# Altium PCB PCB_OSUKeyboardBottom.pcbdoc
Units mil, origin at the board's own origin, x right, y up, seen from the top; angles counter-clockwise.
Board outline 5218.84 x 4281.32 mil, 2 copper layers (Top Layer, Bottom Layer); 17 components, 10 nets, 48 pads, 0 vias.
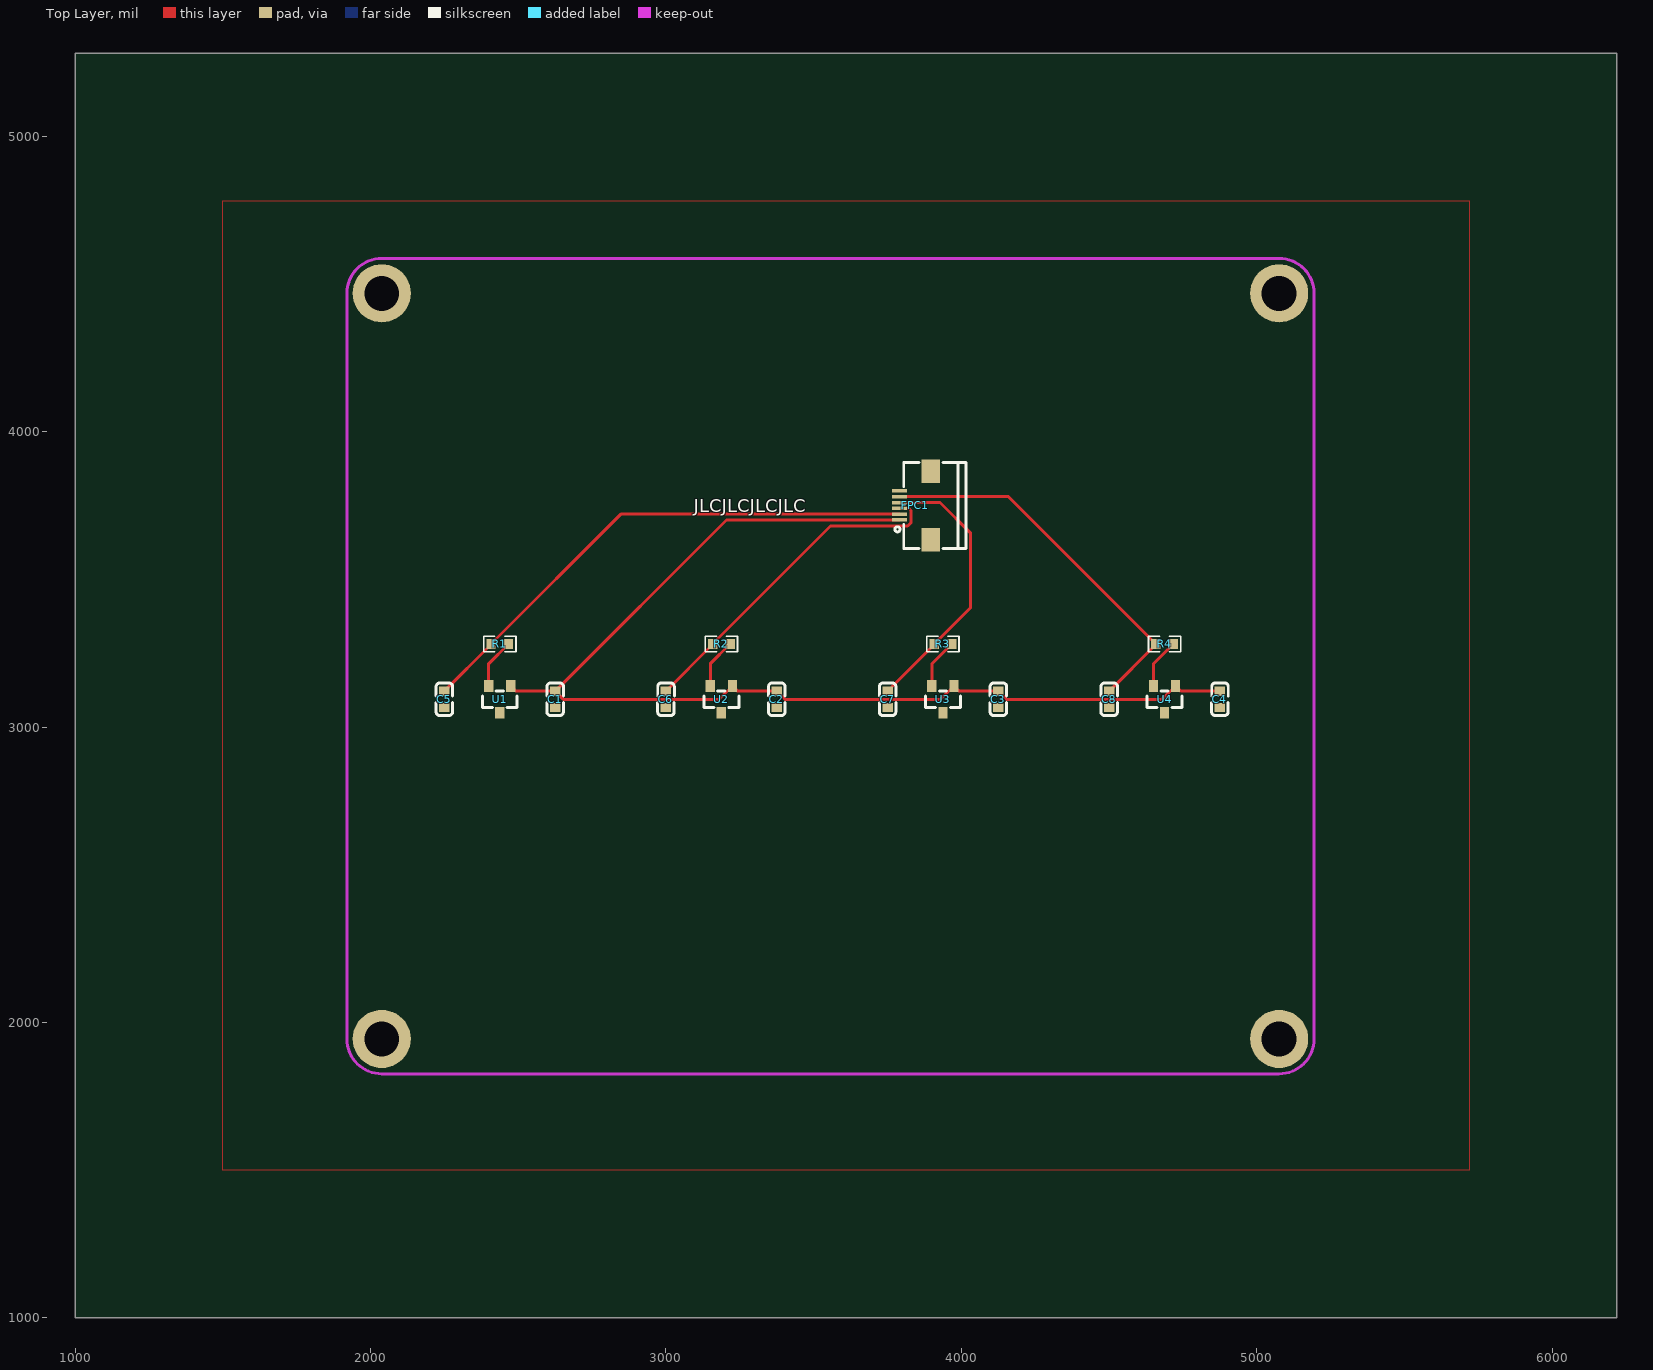
[diagram p0: Top Layer view]
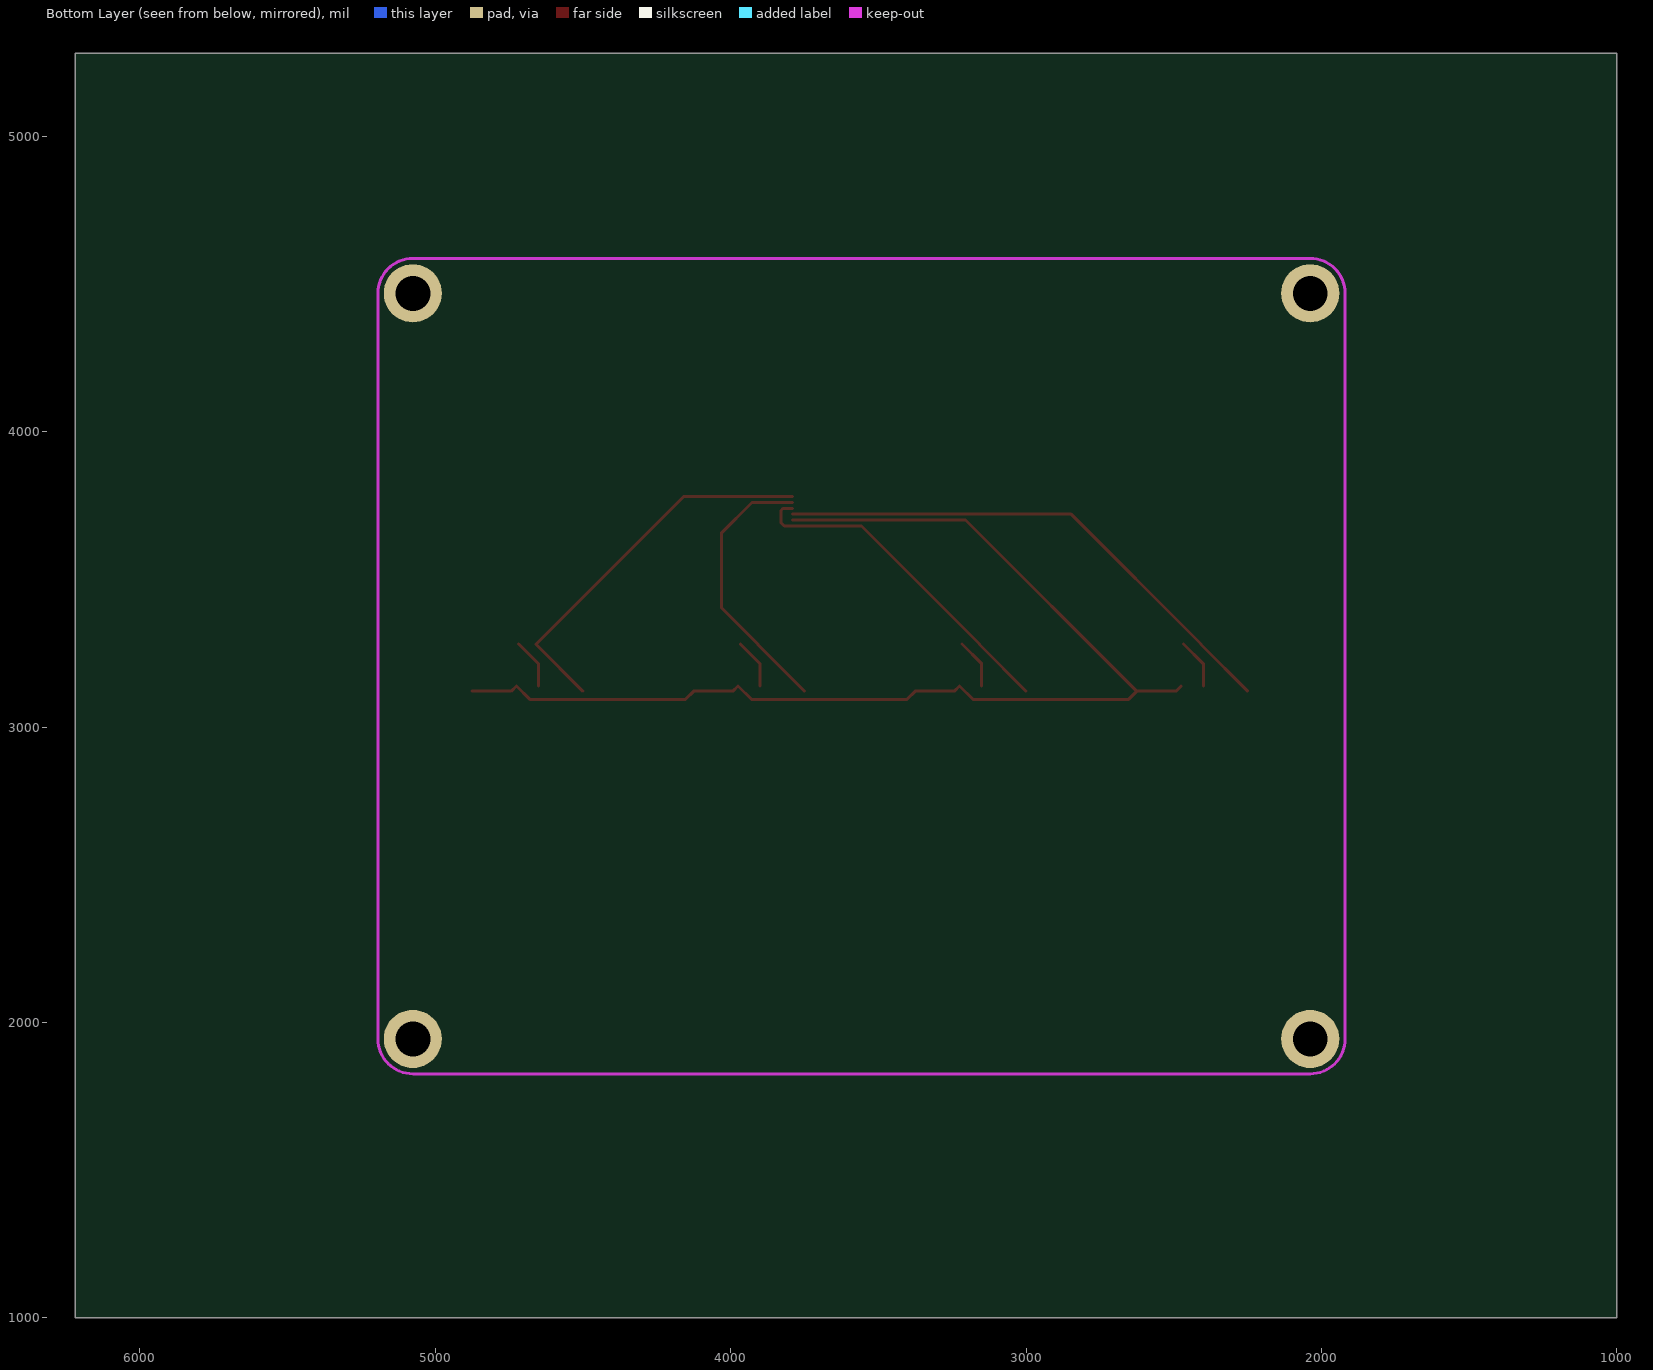
[diagram p1: Bottom Layer view, seen from below]

## Layer stack, top to bottom
Top Layer: signal copper (thickness not stored)
Dielectric: dielectric 12.6, FR-4, Dk 4.8
Bottom Layer: signal copper (thickness not stored)

## Board outline
6218.84,1000 1000,1000 1000,5281.32 6218.84,5281.32

## Components (designator, comment, footprint, x,y, rotation, side; value= is the part's Value field where it differs from the comment)
C1 "0.1u" C0603 2625.02,3093.78 r270 top
C2 "0.1u" C0603 3375.04,3093.78 r270 top
C3 "0.1u" C0603 4125.06,3093.78 r270 top
C4 "0.1u" C0603 4875.07,3093.78 r270 top
C5 "0.1u" C0603 2250.02,3093.78 r270 top
C6 "0.1u" C0603 3000.03,3093.78 r270 top
C7 "0.1u" C0603 3750.05,3093.78 r270 top
C8 "0.1u" C0603 4500.06,3093.78 r270 top
FPC1 "AFC01-S06FCA-00" FPC-SMD_P0.50-6P_AFC01-S06FCA-00 3843.8,3750.05 r90 top
R1 "1k" R0603 2437.52,3281.29 r180 top
R2 "1k" R0603 3187.54,3281.29 r180 top
R3 "1k" R0603 3937.55,3281.29 r180 top
R4 "1k" R0603 4687.57,3281.29 r180 top
U1 "DRV5056A2QDBZR" SOT-23_L2.9-W1.3-P1.90-LS2.4-BR 2437.52,3093.78 r90 top
U2 "DRV5056A2QDBZR" SOT-23_L2.9-W1.3-P1.90-LS2.4-BR 3187.54,3093.78 r90 top
U3 "DRV5056A2QDBZR" SOT-23_L2.9-W1.3-P1.90-LS2.4-BR 3937.55,3093.78 r90 top
U4 "DRV5056A2QDBZR" SOT-23_L2.9-W1.3-P1.90-LS2.4-BR 4687.57,3093.78 r90 top

## Footprints (in the part's own frame and the unit in brackets; to place one, negate y for a bottom-side part, rotate by r counter-clockwise, add the part's x,y. Pads: shape width x height; smd on the part's side, far side on the other; paste and mask are expansions set on the pad)
C0603 [mm]
  rect 0.8x0.9 smd paste+0 mask+0.051: 1(-0.7,0) 2(0.7,0)
  silkscreen extent -1.41,-0.71 1.39,0.72
FPC-SMD_P0.50-6P_AFC01-S06FCA-00 [mm]
  rect 0.3x1.3 smd paste+0 mask+0.051: 1(-1.248,1.339) 2(-0.748,1.339) 3(-0.248,1.339) 4(0.252,1.339) 5(0.752,1.339) 6(1.252,1.339)
  rect 2x1.6 smd paste+0 mask+0.051: 7(-2.95,-1.339) 8(2.95,-1.339)
  silkscreen extent -3.72,-4.36 3.7,1.75
R0603 [mil]
  rect 31.75x34.02 smd paste-3937.01 mask+2: 1(-29.66,0) 2(29.66,0)
  silkscreen extent -55,-26 55,26
SOT-23_L2.9-W1.3-P1.90-LS2.4-BR [mm]
  rect 1x0.8 smd paste+0 mask+0.051: 1(1.15,-0.95) 2(1.15,0.95) 3(-1.15,0)
  silkscreen extent -0.7,-1.5 0.7,1.5

## Free pads (board coordinates)
  round 196.85 hole 118.11 paste+0 mask+2: 1(5075.53,4468.01) 2(2038.16,4468.01) 3(2038.16,1944.43) 4(5075.53,1944.43)

## Nets (pads, with @x,y where several pads share a name; then routed paths per layer and width w, separated by ;. In a path a pad name is that pad's centre, name@x,y a point inside that pad or via, vN(x,y) a via of type N, cw(c..) or ccw(c..) an arc to the next point about the centre after c; other vN are vias at no path point)
GND: C1.2 C2.2 C3.2 C4.2 C5.2 C6.2 C7.2 C8.2 FPC1.6 pad.1 pad.2 pad.3 pad.4 U1.3 U2.3 U3.3 U4.3
K1: C5.1 FPC1.2 R1.2 | length 1790.5
  Top Layer w10: C5.1 2407.86,3279.19 R1.2 2847.18,3720.61 FPC1.2
K2: C6.1 FPC1.3 R2.2 | length 1149.1
  Top Layer w10: C6.1 3157.88,3279.19 R2.2 ; R2.2 3557.07,3680.56 3818.27,3680.56 3829.27,3691.56 3829.27,3732.56 3821.47,3740.26 FPC1.3
K3: C7.1 FPC1.4 R3.2 | length 934.6
  Top Layer w10: C7.1 3907.89,3279.19 R3.2 ; FPC1.4 3927.67,3759.96 4031.27,3656.26 4031.27,3404.66 R3.2
K4: C8.1 FPC1.5 R4.2 | length 1298.6
  Top Layer w10: FPC1.5 4159.54,3779.66 R4.2 4657.91,3279.19 C8.1
U1_2: R1.1 U1.2 | length 170
  Top Layer w10: U1.2 2400.12,3214.23 R1.1
U2_2: R2.1 U2.2 | length 181.1
  Top Layer w10: U2.2@3150.17,3150.16 3150.17,3139.06 3150.14,3214.23 R2.1
U3_2: R3.1 U3.2 | length 170
  Top Layer w10: U3.2@3900.15,3139.06 3900.15,3214.22 R3.1
U4_2: R4.1 U4.2 | length 170
  Top Layer w10: U4.2 4650.17,3214.23 R4.1
VCC: C1.1 C2.1 C3.1 C4.1 FPC1.1 U1.1 U2.1 U3.1 U4.1 | length 3926.1
  Top Layer w10: U1.1 2492.63,3121.34 C1.1 ; FPC1.1 3204.59,3700.91 C1.1 ; C4.1 4742.68,3121.34 U4.1 4679.7,3093.78 4152.62,3093.78 C3.1 3992.67,3121.34 U3.1 3929.69,3093.78 3402.6,3093.78 C2.1 3242.65,3121.34 U2.1 3179.67,3093.78 2652.58,3093.78 C1.1
pads on no net: FPC1.7 FPC1.8

## Polygon pours and split planes (outlines as drawn)
GND on Top Layer (solid): 1500,4781.32 5718.84,4781.32 5718.84,1500 1500,1500

## Keep-outs
Keep-Out Layer:
  lines w10: 1920.05,1944.44 ccw(c2038.15,1944.44) 2038.15,1826.33 ; 1920.05,4468.02 cw(c2038.15,4468.02) 2038.15,4586.12 ; 5075.52,1826.33 ccw(c5075.52,1944.44) 5193.63,1944.44 ; 5075.52,4586.12 cw(c5075.52,4468.02) 5193.63,4468.02

## Silkscreen, mask and mechanical layers (free items; w line width, h text height)
Top Overlay:
  text "JLCJLCJLCJLC" at 3093.79,3727.54 h45